# Altium PCB yyb_v2.5.PcbDoc
Units mil, origin at the board's own origin, x right, y up, seen from the top; angles counter-clockwise.
Board outline 714.6 x 10192.67 mil, 2 copper layers (Top Layer, Bottom Layer); 56 components, 79 nets, 244 pads, 156 vias.
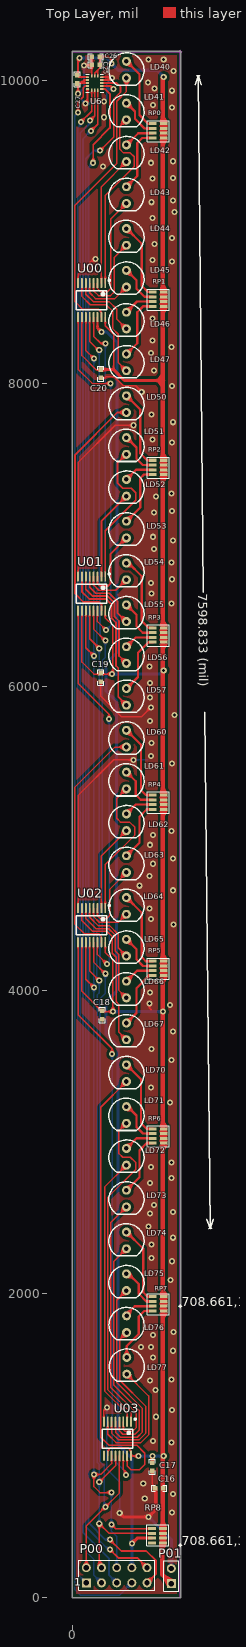
[diagram p0: Top Layer view]
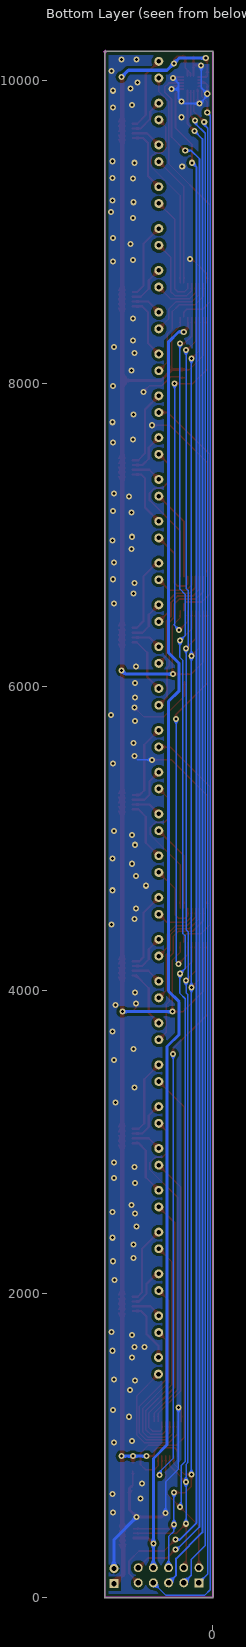
[diagram p1: Bottom Layer view, seen from below]

## Layer stack, top to bottom
Top Solder: solder mask 0.4, Solder Resist, Dk 3.5
Top Layer: signal copper 1.4
Dielectric1: dielectric 12.6, FR-4, Dk 4.8
Bottom Layer: signal copper 1.4
Bottom Solder: solder mask 0.4, Solder Resist, Dk 3.5

## Board outline
0,-2.97 cw(c0,0) -2.97,0 -2.97,10186.73 cw(c0,10186.73) 0,10189.7 708.66,10189.7 cw(c708.66,10186.73) 711.63,10186.73 711.63,0 cw(c708.66,0) 708.66,-2.97

## Design rules (kind name [scope] priority, off if disabled: settings)
Clearance Poly [InPoly] p1: gap=20
Clearance [All] p2: gap=7
PolygonConnect via [IsVia] p1: connectstyle=Direct reliefconductorwidth=10 reliefentries=4 polygonreliefangle="90 Angle" airgapwidth=10
PolygonConnect [All] p2: connectstyle=Relief reliefconductorwidth=10 reliefentries=4 polygonreliefangle="90 Angle" airgapwidth=10
RoutingVias [All] p1: holewidth=20 width=40 viastyle="Through Hole" minholewidth=15 minwidth=30 maxholewidth=28 maxwidth=50
SolderMaskExpansion [All] p1: expansion=4
Width [All] p1: maxlimit=100 minlimit=8 preferedwidth=10 minimp=50.000000 maximp=50.000000 favimp=50.000000
30 further rules are at their usual default settings.

## Classes and differential pairs
component class yyb_v2.5_leds: C16 C17 C18 C19 C20 LD40 LD41 LD42 LD43 LD44 LD45 LD46 LD47 LD50 LD51 LD52 LD53 LD54 LD55 LD56 LD57 LD60 LD61 LD62 LD63 LD64 LD65 LD66 LD67 LD70 LD71 LD72 LD73 LD74 LD75 LD76 LD77 P00 P01 RP0 RP1 RP2 RP3 RP4 RP5 RP6 RP7 RP8 U00 U01 U02 U03
component class yyb_v2.5_sensor: C25 C26 C27 U6

## Components (designator, comment, footprint, x,y, rotation, side; value= is the part's Value field where it differs from the comment)
C16 "0.1uF" 0603C 570,720 r0 top
C17 "0.1uF" 0603C 525,860 r90 top
C18 "0.1uF" 0603C 195,3837.5 r90 top
C19 "0.1uF" 0603C 185,6062.5 r90 top
C20 "0.1uF" 0603C 185,8065 r90 top
C25 "10uF" 0603C 152.5,10100 r0 top
C26 "100nF" 0603C 152.5,10155 r0 top
C27 "100nF" 0603C 30,10005 r90 top
LD40 "LED0" LED5 352.2,10067.99 r270 top
LD41 "LED0" LED5 352.2,9792.4 r270 top
LD42 "LED0" LED5 352.2,9516.81 r270 top
LD43 "LED0" LED5 352.2,9241.22 r270 top
LD44 "LED0" LED5 352.2,8965.63 r270 top
LD45 "LED0" LED5 352.2,8690.04 r270 top
LD46 "LED0" LED5 352.2,8414.45 r270 top
LD47 "LED0" LED5 352.2,8138.86 r270 top
LD50 "LED0" LED5 352.2,7863.27 r270 top
LD51 "LED0" LED5 352.2,7587.68 r270 top
LD52 "LED0" LED5 352.2,7312.09 r270 top
LD53 "LED0" LED5 352.2,7036.5 r270 top
LD54 "LED0" LED5 352.2,6760.9 r270 top
LD55 "LED0" LED5 352.2,6485.31 r270 top
LD56 "LED0" LED5 352.2,6209.72 r270 top
LD57 "LED0" LED5 352.2,5934.13 r270 top
LD60 "LED0" LED5 352.2,5658.54 r270 top
LD61 "LED0" LED5 352.2,5382.95 r270 top
LD62 "LED0" LED5 352.2,5107.36 r270 top
LD63 "LED0" LED5 352.2,4831.77 r270 top
LD64 "LED0" LED5 352.2,4556.18 r270 top
LD65 "LED0" LED5 352.2,4280.59 r270 top
LD66 "LED0" LED5 352.2,4005 r270 top
LD67 "LED0" LED5 352.2,3729.41 r270 top
LD70 "LED0" LED5 352.2,3453.82 r270 top
LD71 "LED0" LED5 352.2,3178.23 r270 top
LD72 "LED0" LED5 352.2,2902.64 r270 top
LD73 "LED0" LED5 352.2,2627.05 r270 top
LD74 "LED0" LED5 352.2,2351.46 r270 top
LD75 "LED0" LED5 352.2,2075.87 r270 top
LD76 "LED0" LED5 352.87,1799.25 r270 top
LD77 "LED0" LED5 354.33,1525.31 r270 top
P00 "Header 5X2" HDR2X5 90,95 r0 top
P01 "Header 2" HDR1X2 650,90 r90 top
RP0 "470R" 4P8 527.51,9712.99 r0 top
RP1 "470R" 4P8 527.51,8602.99 r0 top
RP2 "470R" 4P8 527.51,7494.49 r0 top
RP3 "470R" 4P8 527.51,6389.49 r0 top
RP4 "470R" 4P8 527.51,5287.99 r0 top
RP5 "470R" 4P8 527.51,4192.99 r0 top
RP6 "470R" 4P8 527.51,3087.99 r0 top
RP7 "470R" 4P8 527.51,1981.5 r0 top
RP8 "1K" 4P8 595,358.5 r180 top
U00 "M54HC595F1R" LC-TSSOP-16 125,8550 r180 top
U01 "M54HC595F1R" LC-TSSOP-16 125,6615 r180 top
U02 "M54HC595F1R" LC-TSSOP-16 125,4430 r180 top
U03 "M54HC595F1R" LC-TSSOP-16 295,1045 r180 top
U6 "LIS3DH" LGA16R50P7X5_300X300X100 145,9980 r0 top

## Footprints (in the part's own frame and the unit in brackets; to place one, negate y for a bottom-side part, rotate by r counter-clockwise, add the part's x,y. Pads: shape width x height; smd on the part's side, far side on the other; paste and mask are expansions set on the pad)
4P8 [mil]
  rect 50x20 smd: 1(0,0) 2(0,-31.5) 3(0,-62.99) 4(0,-94.49) 5(72.49,-94.49) 6(72.49,-62.99) 7(72.49,-31.5) 8(72.49,0)
  silkscreen extent -36,-120 108,20
0603C [mil]
  rect 30x30 smd: 1(27.5,0) 2(-27.5,0)
  silkscreen extent -50,-20 50,20
HDR1X2 [mm] "Connector; Header; 2 Position"
  rect 1.5x1.5 hole 0.9: 1(0,0)
  round 1.5 hole 0.9: 2(2.54,0)
  silkscreen extent -1.27,-1.27 3.81,1.27
HDR2X5 [mm] "Connector; Header; 5x2 Position"
  rect 1.5x1.5 hole 0.9: 1(0,0)
  round 1.5 hole 0.9: 2(0,2.54) 3(2.54,0) 4(2.54,2.54) 5(5.08,0) 6(5.08,2.54) 7(7.62,0) 8(7.62,2.54) 9(10.16,0) 10(10.16,2.54)
  silkscreen extent -1.27,-1.27 11.43,3.81
LC-TSSOP-16 [mm]
  oval 0.32x1.7 smd: 1(-2.275,-2.85) 2(-1.625,-2.85) 3(-0.975,-2.85) 4(-0.325,-2.85) 5(0.325,-2.85) 6(0.975,-2.85) 7(1.625,-2.85) 8(2.275,-2.85) 9(2.275,2.85) 10(1.625,2.85) 11(0.975,2.85) 12(0.325,2.85) 13(-0.325,2.85) 14(-0.975,2.85) 15(-1.625,2.85) 16(-2.275,2.85)
  silkscreen extent -3.1,-3.45 2.55,1.6
LED5 [mm]
  round 1.5 hole 0.762: 1(-1.416,0.054) 2(1.378,0.054)
  silkscreen extent -2.84,-2.89 2.58,3
LGA16R50P7X5_300X300X100 [mm]
  rect 0.55x0.3 smd paste-25.4 mask-25.4: 1(-1.2,1) 2(-1.2,0.5) 3(-1.2,0) 4(-1.2,-0.5) 5(-1.2,-1) 9(1.2,-1) 10(1.2,-0.5) 11(1.2,0) 12(1.2,0.5) 13(1.2,1)
  rect 0.3x0.55 smd paste-25.4 mask-25.4: 6(-0.5,-1.2) 7(0,-1.2) 8(0.5,-1.2) 14(0.5,1.2) 15(0,1.2) 16(-0.5,1.2)
  silkscreen extent -1.5,-1.5 1.5,1.5

## Part data
C16 C17 C18 C19 C20 C25 C26 C27: library part CAP, "Capacitor"
LD40 LD41 LD42 LD43 LD44 LD45 LD46 LD47 LD50 LD51 LD52 LD53 LD54 LD55 LD56 LD57 LD60 LD61 LD62 LD63 LD64 LD65 LD66 LD67 LD70 LD71 LD72 LD73 LD74 LD75 LD76 LD77: "Typical INFRARED GaAs LED"
P00: "Header, 5-Pin, Dual row"
P01: "Header, 2-Pin"
RP0 RP1 RP2 RP3 RP4 RP5 RP6 RP7 RP8: library part RESPACK3_1
U00 U01 U02 U03: "8 Bit Shift Register with Output Latches (3 STATE)"

## Via types
v1: diameter 40, hole 20, Top Layer to Bottom Layer, 156 vias

## Nets (pads, with @x,y where several pads share a name; then routed paths per layer and width w, separated by ;. In a path a pad name is that pad's centre, name@x,y a point inside that pad or via, vN(x,y) a via of type N, cw(c..) or ccw(c..) an arc to the next point about the centre after c; other vN are vias at no path point)
+2.8V: C16.1 C17.1 C18.1 C19.1 C20.1 C25.1 C26.1 C27.1 P01.1 RP0.5 RP0.6 RP0.7 RP0.8 RP1.5 RP1.6 RP1.7 RP1.8 RP2.5 RP2.6 RP2.7 RP2.8 RP3.5 RP3.6 RP3.7 RP3.8 RP4.5 RP4.6 RP4.7 RP4.8 RP5.5 RP5.6 RP5.7 RP5.8 RP6.5 RP6.6 RP6.7 RP6.8 RP7.5 RP7.6 RP7.7 RP7.8 RP8.1 RP8.2 RP8.3 RP8.4 U00.10 U00.16 U01.10 U01.16 U02.10 U02.16 U03.10 U03.16 U6.1 U6.14 U6.15 | length 15517.3
  Top Layer w10: U02.10 61.02,3993.98 195,3860 v1(265,3860) 265,4200 214.57,4250.43 U02.16 ; U01.10 61.02,6163.98 140,6085 v1(260,6085) 265,6090 265,6405 214.57,6455.43 U01.16 ; U00.10 61.02,8183.98 155,8090 C20.1@185,8090 ; U00.16 214.57,8380.43 270,8325 270,8090 ; U03.10 231.02,966.02 250,985 365,985 384.57,965.43 U03.16 432.2,932.8 v1(435,930)
  Top Layer w12: v1(45,10145) 35,10135 35,10025 40.63,10019.37 U6.1 ; U6.15 145,10045 162.5,10062.5 ; U6.14 164.68,10060.31 162.5,10062.5 ; v1(255,10110) 255,10135 235,10155 C26.1 C25.1 180,10080 162.5,10062.5
  Top Layer w20: C20.1 267.5,8092.5 270,8090 340,8020 595,8020 ; C17.1 v1(525,930)
  Top Layer w30: v1(600,10020) 595,10015 595,8508.5 595,8020 595,7400 595,6110 595,5287.99 595,4192.99 v1(595,3860) 595,2993.5 595,1887.01 RP8.4 RP8.3 RP8.2 RP8.1 590,353.5 590,150 P01.1
  Bottom Layer w20: v1(45,10145) 220,10145 v1(255,10110) 300,10065 555,10065 v1(600,10020) ; v1(260,6085) 575,6085 v1(600,6110) ; v1(265,3860) v1(595,3860) ; v1(435,930) v1(525,930) v1(600,930)
GND: C16.2 C17.2 C18.2 C19.2 C20.2 C25.2 C26.2 C27.2 P01.2 U00.8 U01.8 U02.8 U03.8 U6.2 U6.3 U6.5 U6.10 U6.12 U6.13 U6.16 | length 6680.2
  Top Layer w10: U02.8 35.43,5285.43 270,5520 v1(400,5520) ; U01.8 35.43,7480.43 280,7725 v1(400,7725) ; U00.8 35.43,8720.43 135,8820 v1(150,8820) ; C19.2 185,5940 320,5805 455,5805 v1(515,5865) ; C20.2 212.5,8037.5 220,8045 275,8045 335,7985 415,7985 v1(455,7945) ; U03.8 205.43,1230.43 v1(225,1250) ; v1(505,3915) 505,3885 517.5,3872.5 ; C17.2 525,742.5 C16.2@547.5,720
  Top Layer w12: v1(35,9910) 35,9970 45,9980 55,9980 ; v1(75,10095) 80,10100 C25.2 ; v1(85,9845) 97.76,9857.76 U6.5 ; U6.3 55,9980 ; U6.2 74.68,9999.69 55,9980 ; C26.2 125.32,10154.69 U6.16 ; U6.10 249.68,9960.31 v1(270,9940) ; U6.12 v1@259.68,9999.69 ; U6.13 v1@250.63,10019.37 ; v1@200,9855 v1(205,9860)
  Top Layer w20: v1(310,555) 335,530 v1(500,530) 547.5,577.5 C16.2@547.5,720
  Bottom Layer w10: v1(225,1250) 225,845 310,760 v1(310,555) ; v1(400,5520) 495,5520
  Bottom Layer w12: v1(75,10095) 75,9950 v1(35,9910) 35,9895 v1(85,9845) 190,9845 v1(205,9860) 225,9880 225,9940 ; v1(260,10015) 225,9980 225,9940 ; v1(270,9940) 225,9940
  Bottom Layer w20: v1(500,530) 650,380 P01.2
  other v1: 655,560 475,650 660,680 465,750 650,1020 530,1030 550,1190 655,1235 545,1365 510,1430 650,1435 530,1580 660,1625 450,1650 515,1650 530,1730 665,1750 645,2090 655,2215 520,2235 520,2325 660,2370 500,2445 510,2530 660,2540 535,2585 510,2730 650,2765 515,2835 650,2865 640,3260 515,3360 650,3540 520,3615 660,3730 640,3905 510,3985 665,4435 515,4470 505,4540 660,4660 440,4690 505,4755 530,4835 660,4870 510,4960 530,5025 650,5050 655,5495 515,5545 520,5630 510,5775 670,5815 510,5930 510,6025 505,6135 650,6550 520,6615 515,6685 655,6710 650,6820 535,6910 660,6965 530,6990 535,7150 655,7160 550,7255 650,7275 655,7610 525,7630 660,7745 520,7795 655,7985 535,8085 515,8200 650,8240 525,8285 525,8430 655,8805 525,8815 540,8920 655,8960 525,9090 670,9130 520,9195 660,9205 525,9350 660,9355 200,9430 515,9455 660,9465 205,9755 655,9820 530,9835 655,9930 540,9945 495,9985 665,10060 500,10135 600,10135
LED00: LD40.2 U00.15 | length 1850.1
  Top Layer w10: U00.15 188.98,8471.02 170,8490 65,8490 14.95,8540.05 14.95,9174.95 290,9450 290,9860 354.33,9924.33 LD40.2
LED01: LD41.2 U00.1 | length 1238.9
  Top Layer w10: U00.1 214.57,9239.57 405,9430 405,9495 380,9520 335,9520 310,9545 310,9693.82 LD41.2
LED02: LD42.2 U00.2 | length 868.8
  Top Layer w10: U00.2 188.98,9297.21 LD42.2
LED03: LD43.2 U00.3 | length 744.6
  Top Layer w10: U00.3 163.39,8626.61 185,8605 230,8605 250,8625 250,9082.64 LD43.2
LED04: LD44.2 U00.4 | length 550.1
  Top Layer w10: U00.4 137.8,8612.2 170,8580 250,8580 275,8605 275,8832.05 LD44.2
LED05: LD45.2 U00.5 | length 353.6
  Top Layer w10: U00.5 112.2,8597.8 150,8560 278.54,8560 LD45.2
LED06: LD46.2 U00.6 | length 474.4
  Top Layer w10: U00.6 86.61,8588.39 135,8540 240,8540 290,8490 290,8424.52 LD46.2
LED07: LD47.2 U00.7 | length 760.6
  Top Layer w10: U00.7 61.02,8573.98 115,8520 220,8520 265,8475 265,8360 300,8325 300,8138.93 LD47.2
LED10: LD50.2 U01.15 | length 1614.3
  Top Layer w12: U01.15 188.98,6546.02 175,6560 70.95,6560 15.95,6615 15.95,7530.95 294.02,7809.02 LD50.2
LED11: LD51.2 U01.1 | length 995.7
  Top Layer w12: U01.1 214.57,7029.57 415,7230 415,7280 385,7310 330,7310 295,7345 295,7474.1 LD51.2
LED12: LD52.2 U01.2 | length 599.1
  Top Layer w12: U01.2 188.98,7092.48 LD52.2
LED13: LD53.2 U01.3 | length 487.8
  Top Layer w12: U01.3 163.39,6681.61 180,6665 230,6665 250,6685 250,6877.91 LD53.2
LED14: LD54.2 U01.4 | length 315
  Top Layer w12: U01.4 137.8,6672.2 173,6637 284.68,6637 LD54.2
LED15: LD55.2 U01.5 | length 449.2
  Top Layer w12: U01.5 112.2,6657.8 152,6618 242,6618 295,6565 295,6490.39 LD55.2
LED16: LD56.2 U01.6 | length 741.2
  Top Layer w12: U01.6 86.61,6643.39 131,6599 231,6599 275,6555 275,6465 305,6435 305,6204.8 LD56.2
LED17: LD57.2 U01.7 | length 1033.3
  Top Layer w12: U01.7 61.02,6628.98 110,6580 220,6580 255,6545 255,6455 285,6425 285,6140 300,6125 300,5934.21 LD57.2
LED20: LD60.2 U02.15 | length 1598.8
  Top Layer w10: U02.15 188.98,4356.02 172,4373 77,4373 14.95,4435.05 14.95,5339.95 279.29,5604.29 LD60.2
LED21: LD61.2 U02.1 | length 978.9
  Top Layer w10: U02.1 214.57,4829.57 410,5025 410,5075 375,5110 315,5110 290,5135 290,5264.37 LD61.2
LED22: LD62.2 U02.2 | length 579.4
  Top Layer w10: U02.2 188.98,4887.76 LD62.2
LED23: LD63.2 U02.3 | length 475.2
  Top Layer w10: U02.3 163.39,4491.61 180,4475 225,4475 245,4495 245,4668.19 LD63.2
LED24: LD64.2 U02.4 | length 308.5
  Top Layer w10: U02.4 137.8,4487.2 175,4450 302.4,4450 LD64.2
LED25: LD65.2 U02.5 | length 460.1
  Top Layer w10: U02.5 112.2,4482.8 170,4425 245,4425 300,4370 300,4280.67 LD65.2
LED26: LD66.2 U02.6 | length 752.1
  Top Layer w10: U02.6 86.61,4473.39 153,4407 238,4407 280,4365 280,4260 305,4235 305,4000.08 LD66.2
LED27: LD67.2 U02.7 | length 1044.2
  Top Layer w10: U02.7 61.02,4458.98 130,4390 225,4390 260,4355 260,4245 287,4218 287,3925 305,3907 305,3724.49 LD67.2
LED30: LD70.2 U03.15 | length 3031.3
  Top Layer w10: LD70.2 185,3230.24 185,1055 237,1003 422,1003 475,950 475,875 440,840 385,840 358.98,866.02 U03.15
LED31: LD71.2 U03.1 | length 2202.7
  Top Layer w10: LD71.2 305,3074.65 305,2925 330,2900 380,2900 415,2865 415,2820 230,2635 230,1370 384.57,1215.43 U03.1
LED32: LD72.2 U03.2 | length 1812.7
  Top Layer w10: LD72.2 210,2704.06 210,1360 358.98,1211.02 U03.2
LED33: LD73.2 U03.3 | length 1718.8
  Top Layer w10: U03.3 333.39,1106.61 345,1095 395,1095 420,1120 420,1215 250,1385 250,2468.47 LD73.2
LED34: LD74.2 U03.4 | length 1511.4
  Top Layer w10: U03.4 307.8,1097.2 330,1075 410,1075 440,1105 440,1230 270,1400 270,2212.88 LD74.2
LED35: LD75.2 U03.5 | length 1304
  Top Layer w10: U03.5 282.2,1087.8 315,1055 425,1055 460,1090 460,1245 290,1415 290,1957.28 LD75.2
LED36: LD76.2 U03.6 | length 1090.8
  Top Layer w10: U03.6 256.61,1083.39 303,1037 437,1037 483,1083 483,1257 310,1430 310,1700 LD76.2
LED37: LD77.2 U03.7 | length 855.8
  Top Layer w10: U03.7 231.02,1073.98 285,1020 450,1020 500,1070 500,1327.52 LD77.2
LED_DIN: P00.8 RP8.7 U00.14 | length 8621.8
  Top Layer w10: 163.39,8366.61 U00.14
  Top Layer w20: 163.39,8366.61 v1(190,8340) ; v1(390,355) 425,390 RP8.7
  Bottom Layer w20: v1(190,8340) 225,8340 292,8273 292,6227 220,6155 220,5975 290,5905 290,3995 220,3925 220,3710 300,3630 300,1005 390,915 v1(390,355) P00.8
LED_EN: P00.2 U00.13 U01.13 U02.13 U03.13 | length 9274
  Top Layer w10: P00.2 90,470 v1(215,595) 307.8,687.8 U03.13 ; U02.13 137.8,4187.2 v1(215,4110) ; U01.13 137.8,6382.2 v1(215,6305) ; U00.13 137.8,8312.2 185,8265 v1(215,8265)
  Bottom Layer w10: v1@208,595 208,867 180,895 180,3945 215,3980 v1(215,4110) 180,4145 180,4360 195,4375 195,6175 215,6195 v1(215,6305) 180,6340 180,6610 215,6645 v1(215,8265)
LED_RCK: P00.4 RP8.6 U00.12 U01.12 U02.12 U03.12 | length 9456.4
  Top Layer w10: U02.12 112.2,4127.8 v1(175,4065) ; U01.12 112.2,6317.8 v1(175,6255) ; U00.12 112.2,8277.8 170,8220 v1(175,8220) ; v1(175,760) 282.2,867.2 U03.12 ; P00.4 175,210 v1(175,485) 238.5,421.5 RP8.6
  Bottom Layer w10: v1(175,485) v1(175,760) 175,875.96 163,887.96 163,3973 175,3985 v1(175,4065) 160,4080 160,4385 175,4400 v1(175,6255) 160,6270 160,6635 175,6650 v1(175,8220)
LED_SRCK: P00.6 RP8.5 U00.11 U01.11 U02.11 U03.11 | length 9491.9
  Top Layer w10: U02.11 86.61,4073.39 v1(140,4020) ; U01.11 86.61,6258.39 v1(140,6205) ; U00.11 86.61,8218.39 v1(140,8165) ; v1(255,480) 282.01,452.99 RP8.5 ; v1(255,690) 180,690 140,730 v1(140,810) 185,810 256.61,881.61 U03.11
  Bottom Layer w10: v1(140,810) v1(140,4020) v1(140,6205) v1(140,8165) ; v1(255,690) v1(255,480) 255,435 290,400 P00.6 P00.6@290,190
NetLD40_1: LD40.1 RP0.1 | length 500.3
  Top Layer w15: LD40.1 440,10038.07 440,9770 497.01,9712.99 RP0.1
NetLD41_1: LD41.1 RP0.2 | length 270
  Top Layer w15: LD41.1 410,9792.48 410,9745 473.5,9681.5 RP0.2
NetLD42_1: LD42.1 RP0.3 | length 205.3
  Top Layer w15: LD42.1 431.77,9650 RP0.3
NetLD43_1: LD43.1 RP0.4 | length 433.7
  Top Layer w15: LD43.1 425,9367.64 425,9585 458.5,9618.5 RP0.4
NetLD44_1: LD44.1 RP1.1 | length 508
  Top Layer w15: LD44.1 455,8920.71 455,8645 497.01,8602.99 RP1.1
NetLD45_1: LD45.1 RP1.2 | length 277.7
  Top Layer w15: LD45.1 420,8680.12 420,8625 473.5,8571.5 RP1.2
NetLD46_1: LD46.1 RP1.3 | length 202.1
  Top Layer w15: LD46.1 424.13,8540 RP1.3
NetLD47_1: LD47.1 RP1.4 | length 423.1
  Top Layer w15: LD47.1 425,8265.28 425,8470 463.5,8508.5 RP1.4
NetLD50_1: LD50.1 RP2.1 | length 517.9
  Top Layer w15: LD50.1 445,7828.34 445,7540 490.51,7494.49 RP2.1
NetLD51_1: LD51.1 RP2.2 | length 290.5
  Top Layer w15: LD51.1 420,7577.75 420,7505 462.01,7462.99 RP2.2
NetLD52_1: LD52.1 RP2.3 | length 199.5
  Top Layer w15: LD52.1 417.99,7431.5 RP2.3
NetLD53_1: LD53.1 RP2.4 | length 413.2
  Top Layer w15: LD53.1 445,7182.91 445,7375 470,7400 RP2.4
NetLD54_1: LD54.1 RP3.1 | length 522.9
  Top Layer w15: LD54.1 368.35,6816.65 455,6730 455,6435 500.51,6389.49 RP3.1
NetLD55_1: LD55.1 RP3.2 | length 293.2
  Top Layer w15: LD55.1 420,6475.39 420,6400 462.01,6357.99 RP3.2
NetLD56_1: LD56.1 RP3.3 | length 198.5
  Top Layer w15: LD56.1 415.35,6326.5 RP3.3
NetLD57_1: LD57.1 RP3.4 | length 393
  Top Layer w15: LD57.1 430,6065.55 430,6225 500,6295 RP3.4
NetLD60_1: LD60.1 RP4.1 | length 524.7
  Top Layer w15: LD60.1 450,5618.62 450,5320 482.01,5287.99 RP4.1
NetLD61_1: LD61.1 RP4.2 | length 300.2
  Top Layer w15: LD61.1 415,5378.03 415,5290 448.5,5256.5 RP4.2
NetLD62_1: LD62.1 RP4.3 | length 198.8
  Top Layer w15: LD62.1 416.22,5225 RP4.3
NetLD63_1: LD63.1 RP4.4 | length 400.6
  Top Layer w15: LD63.1 440,4973.19 440,5145 488.5,5193.5 RP4.4
NetLD64_1: LD64.1 RP5.1 | length 517.3
  Top Layer w15: LD64.1 455,4511.26 455,4220 482.01,4192.99 RP5.1
NetLD65_1: LD65.1 RP5.2 | length 284.1
  Top Layer w15: LD65.1 420,4270.67 420,4205 463.5,4161.5 RP5.2
NetLD66_1: LD66.1 RP5.3 | length 201.9
  Top Layer w15: LD66.1 423.58,4130 RP5.3
NetLD67_1: LD67.1 RP5.4 | length 399.1
  Top Layer w15: LD67.1 420,3850.83 420,4015 503.5,4098.5 RP5.4
NetLD70_1: LD70.1 RP6.1 | length 517
  Top Layer w15: LD70.1 450,3413.89 450,3125 487.01,3087.99 RP6.1
NetLD71_1: LD71.1 RP6.2 | length 290.6
  Top Layer w15: LD71.1 361.02,3233.98 420,3175 420,3100 463.5,3056.5 RP6.2
NetLD72_1: LD72.1 RP6.3 | length 200.8
  Top Layer w15: LD72.1 420.94,3025 RP6.3
NetLD73_1: LD73.1 RP6.4 | length 405.3
  Top Layer w15: LD73.1 440,2768.47 440,2945 488.5,2993.5 RP6.4
NetLD74_1: LD74.1 RP7.1 | length 517.4
  Top Layer w15: LD74.1 465,2296.53 465,2010 493.5,1981.5 RP7.1
NetLD75_1: LD75.1 RP7.2 | length 286.5
  Top Layer w15: LD75.1 368.39,2131.61 435,2065 435,2000 485,1950 RP7.2
NetLD76_1: LD76.1 RP7.3 | length 204.7
  Top Layer w15: LD76.1 355,1865 408.5,1918.5 RP7.3
NetLD77_1: LD77.1 RP7.4 | length 409.3
  Top Layer w15: LD77.1 356.46,1656.46 435,1735 435,1850 472.01,1887.01 RP7.4
NetU00_9: U00.9 U01.14 | length 2389.8
  Top Layer w10: U00.9 35.43,8094.57 130,8000 v1(250,8000) ; U01.14 163.39,6431.61 v1(220,6375)
  Bottom Layer w10: v1(220,6375) 255,6410 250,6415 v1(250,8000)
NetU01_9: U01.9 U02.14 | length 2587.1
  Top Layer w10: U01.9 35.43,6024.57 240,5820 v1(240,5790) ; U02.14 163.39,4236.61 v1(225,4175)
  Bottom Layer w10: v1(225,4175) 240,4190 v1(240,5790)
NetU02_9: U02.9 U03.14 | length 3777.8
  Top Layer w10: U02.9 35.43,3839.57 260,3615 v1(260,3580) ; U03.14 333.39,841.61 350,825 v1(350,805)
  Bottom Layer w10: v1(260,3580) 260,915 350,825 v1(350,805)
SENSOR_INT1: P00.10 U6.11 | length 10257.9
  Top Layer w12: v1(180,9535) 270,9625 270,9875 315,9920 315,9955 290,9980 U6.11 ; v1(245,315) 300,260 425,260 P00.10
  Bottom Layer w12: v1(180,9535) 140,9535 85.95,9480.95 85.95,464.05 235,315 v1(245,315)
SENSOR_INT2: P00.9 U6.9 | length 10261.9
  Top Layer w12: v1(135,9455) 135,9575 245,9685 245,9910 214.37,9940.63 U6.9 ; v1(245,380) 320,305 485,305 550,240 550,155 P00.9
  Bottom Layer w12: v1(135,9455) 104.95,9424.95 104.95,490.05 215,380 v1(245,380)
SPI_CS: P00.5 U6.8 | length 9970.6
  Top Layer w12: v1(120,9665) 164.68,9709.69 U6.8
  Bottom Layer w12: v1(120,9665) 66.95,9611.95 66.95,428.05 240,255 240,145 P00.5
SPI_SDI: P00.1 U6.6 | length 9900.5
  Top Layer w10: v1(55,9725) 125.32,9795.31 U6.6
  Bottom Layer w10: v1(55,9725) 55,9705 31.95,9681.95 31.95,153.05 P00.1
SPI_SDO: P00.3 U6.7 | length 9936
  Top Layer w10: v1(115,9735) 145,9765 U6.7
  Bottom Layer w10: v1(115,9735) 115,9715 48.95,9648.95 48.95,341.05 140,250 140,145 P00.3
SPI_SPC: P00.7 U6.4 | length 10377.5
  Top Layer w10: v1(35,9785) 35,9855 70,9890 70,9950 80.32,9960.31 U6.4
  Bottom Layer w10: v1(35,9785) 14.95,9764.95 14.95,50.05 50,15 310,15 P00.7
pads on no net: RP8.8 U03.9

## Polygon pours and split planes (outlines as drawn)
GND on Bottom Layer "Bottom Layer-No Net" (solid, remove dead copper, pour order 6): 0,0 708.66,0 708.66,10186.73 0,10186.73
GND on Top Layer "Bottom Layer-No Net" (solid, remove dead copper, pour order 8): 0,0 708.66,0 708.66,10186.73 0,10186.73

## Keep-outs
Keep-Out Layer:
  lines w5.91: 0,0 0,10186.73 708.66,10186.73 708.66,0 0,0
  lines w10: 698.66,10186.73 718.66,10186.73 ; 708.66,10176.73 708.66,10196.73
  text "708.661,10186.732 (mil)" at 718.66,10186.73 h60

## Silkscreen, mask and mechanical layers (free items; w line width, h text height)
Top Overlay:
  lines w10: 698.66,344.21 718.66,344.21 ; 698.66,1919.02 718.66,1919.02 ; 708.66,334.21 708.66,354.21 ; 708.66,1909.02 708.66,1929.02 ; 807.39,9969.05 826.77,10029.25 ; 816.77,10029.15 836.77,10029.36 ; 847.39,9969.46 826.77,10029.25 ; 862.04,6625.9 826.77,10029.25 ; 870.24,5834.18 905.51,2430.83 ; 884.89,2490.62 905.51,2430.83 ; 895.51,2430.72 915.51,2430.93 ; 924.89,2491.03 905.51,2430.83
  text "7598.833 (mil)" at 826.15,6615.52 h60 r270.59
  text "708.661,1919.016 (mil)" at 718.66,1919.02 h60
  text "708.661,344.213 (mil)" at 718.66,344.21 h60

## Text inside footprints (layer, text, board x,y; h text height)
P00: Top Overlay "1" at 10,75 h50